# Altium PCB R45_PCBM.PcbDoc (part 1 of 8)
Units mm, origin at the board's own origin, x right, y up, seen from the top; angles counter-clockwise.
Board outline 109 x 109 mm, 4 copper layers (Top Layer, Layer 1, Layer 2, Bottom Layer), stack 0.98 mm thick; 9 components, 0 nets, 14 pads, 1504 vias.
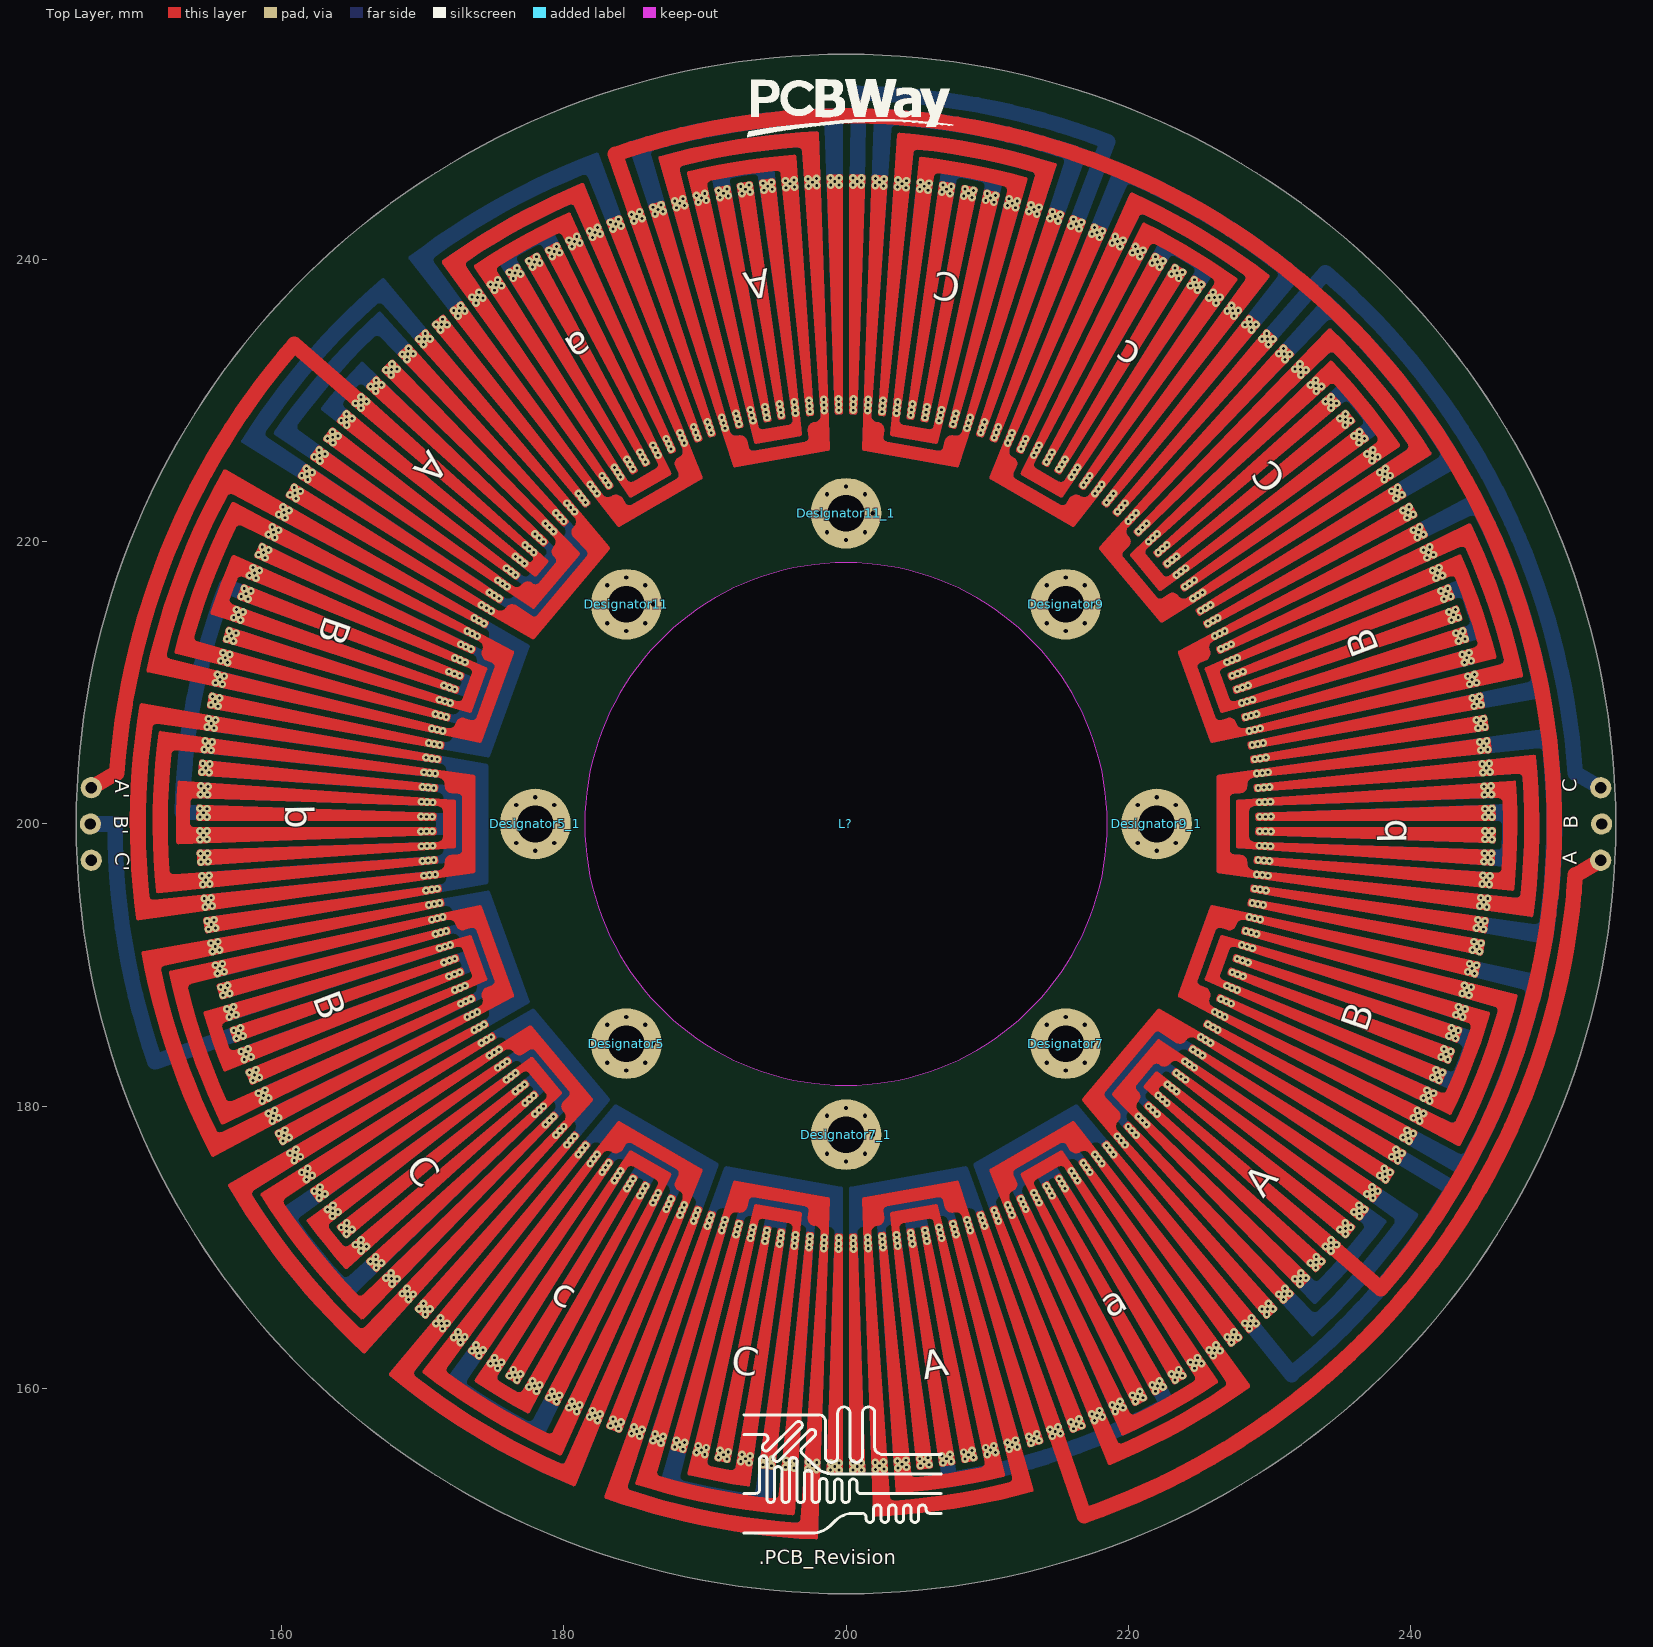
[diagram p0: Top Layer view]
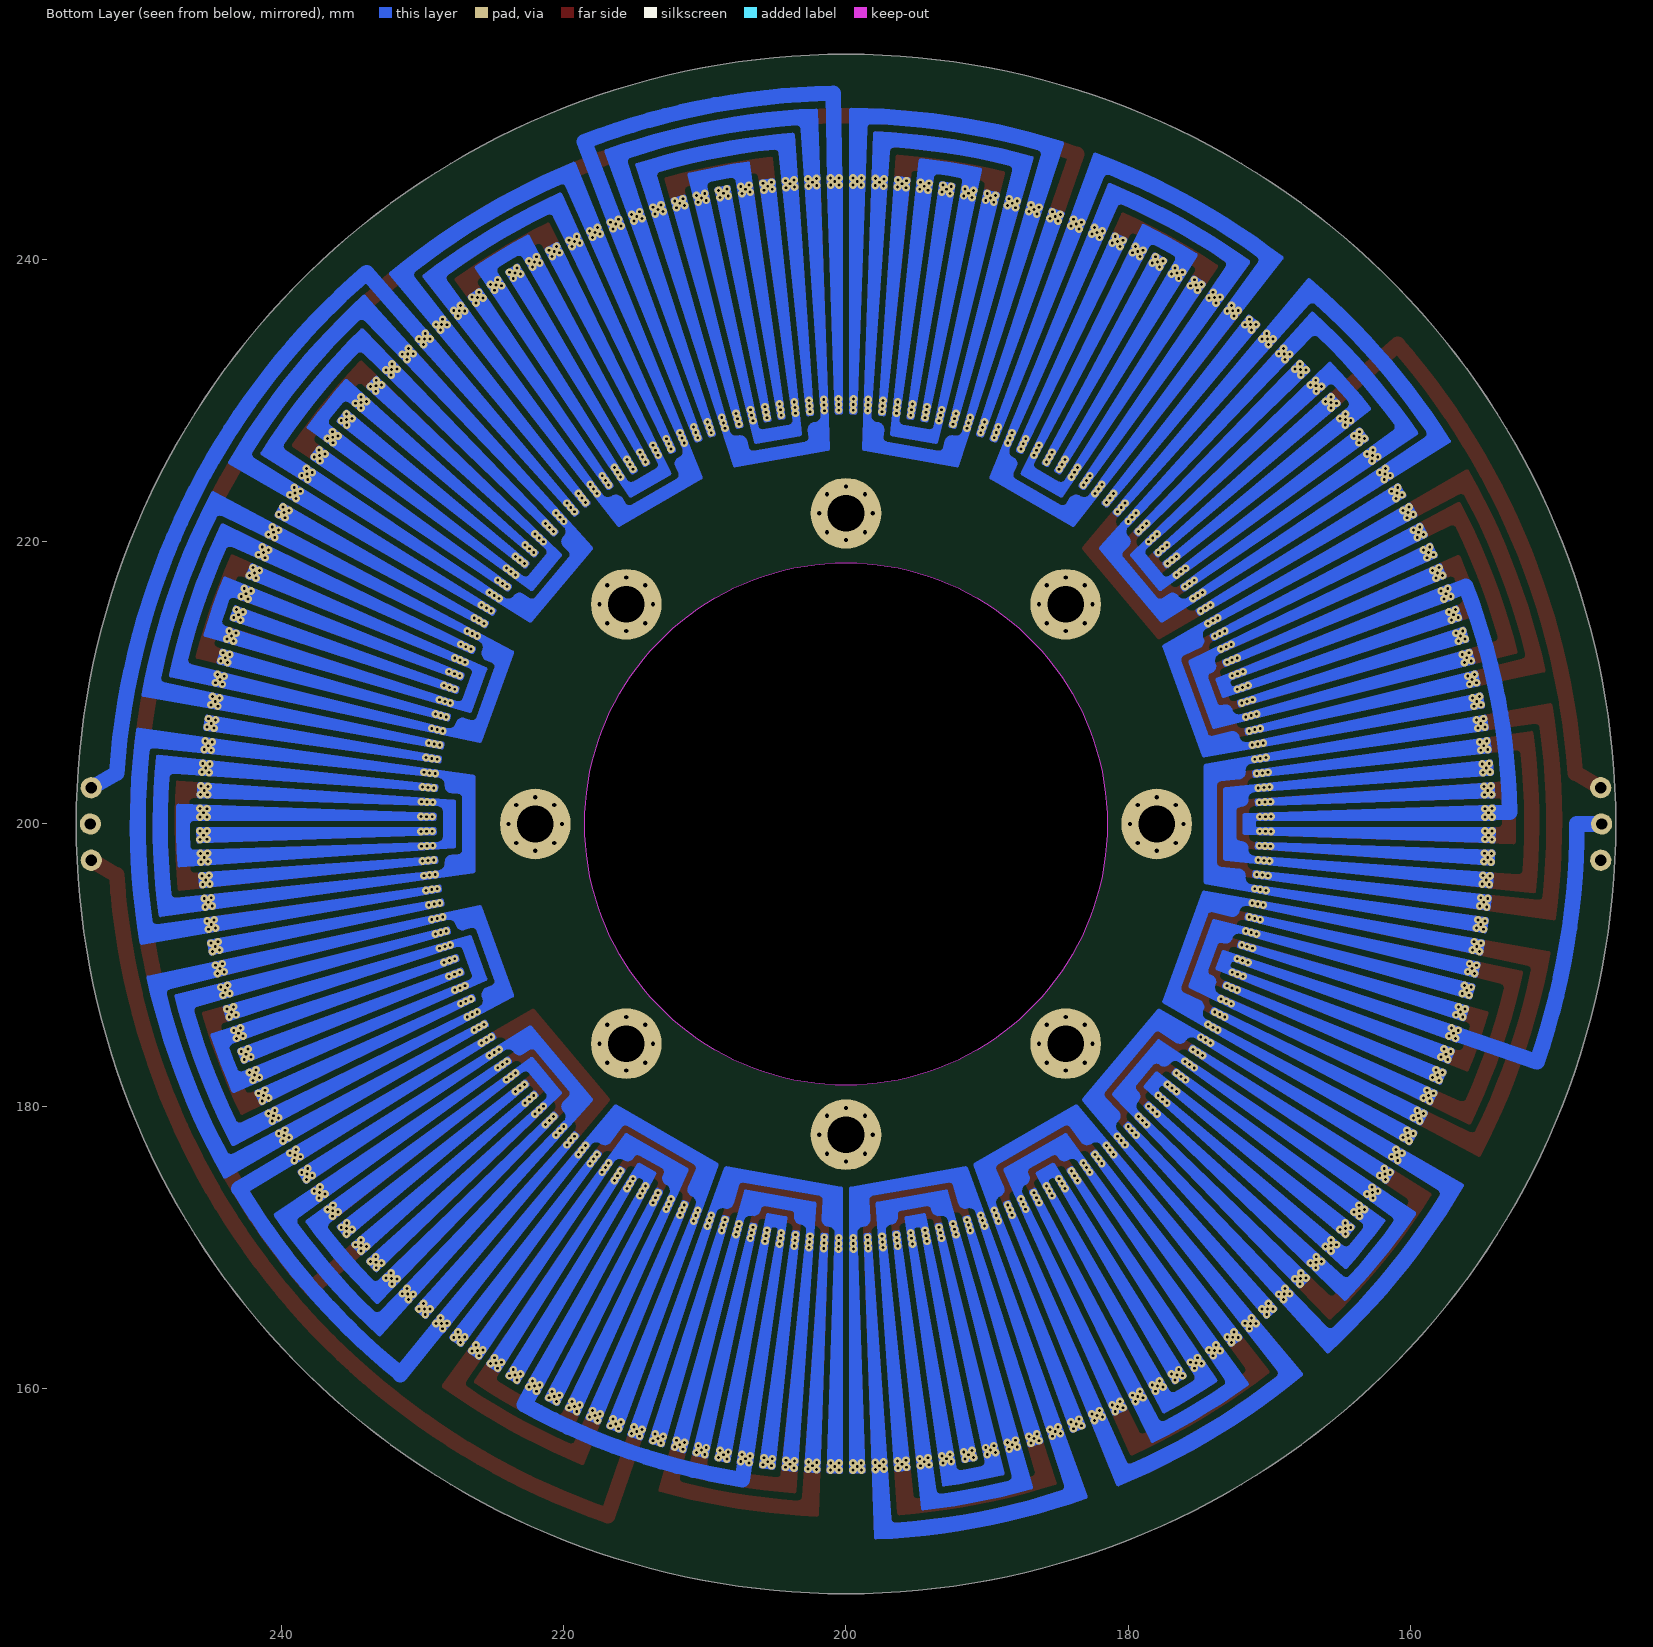
[diagram p1: Bottom Layer view, seen from below]
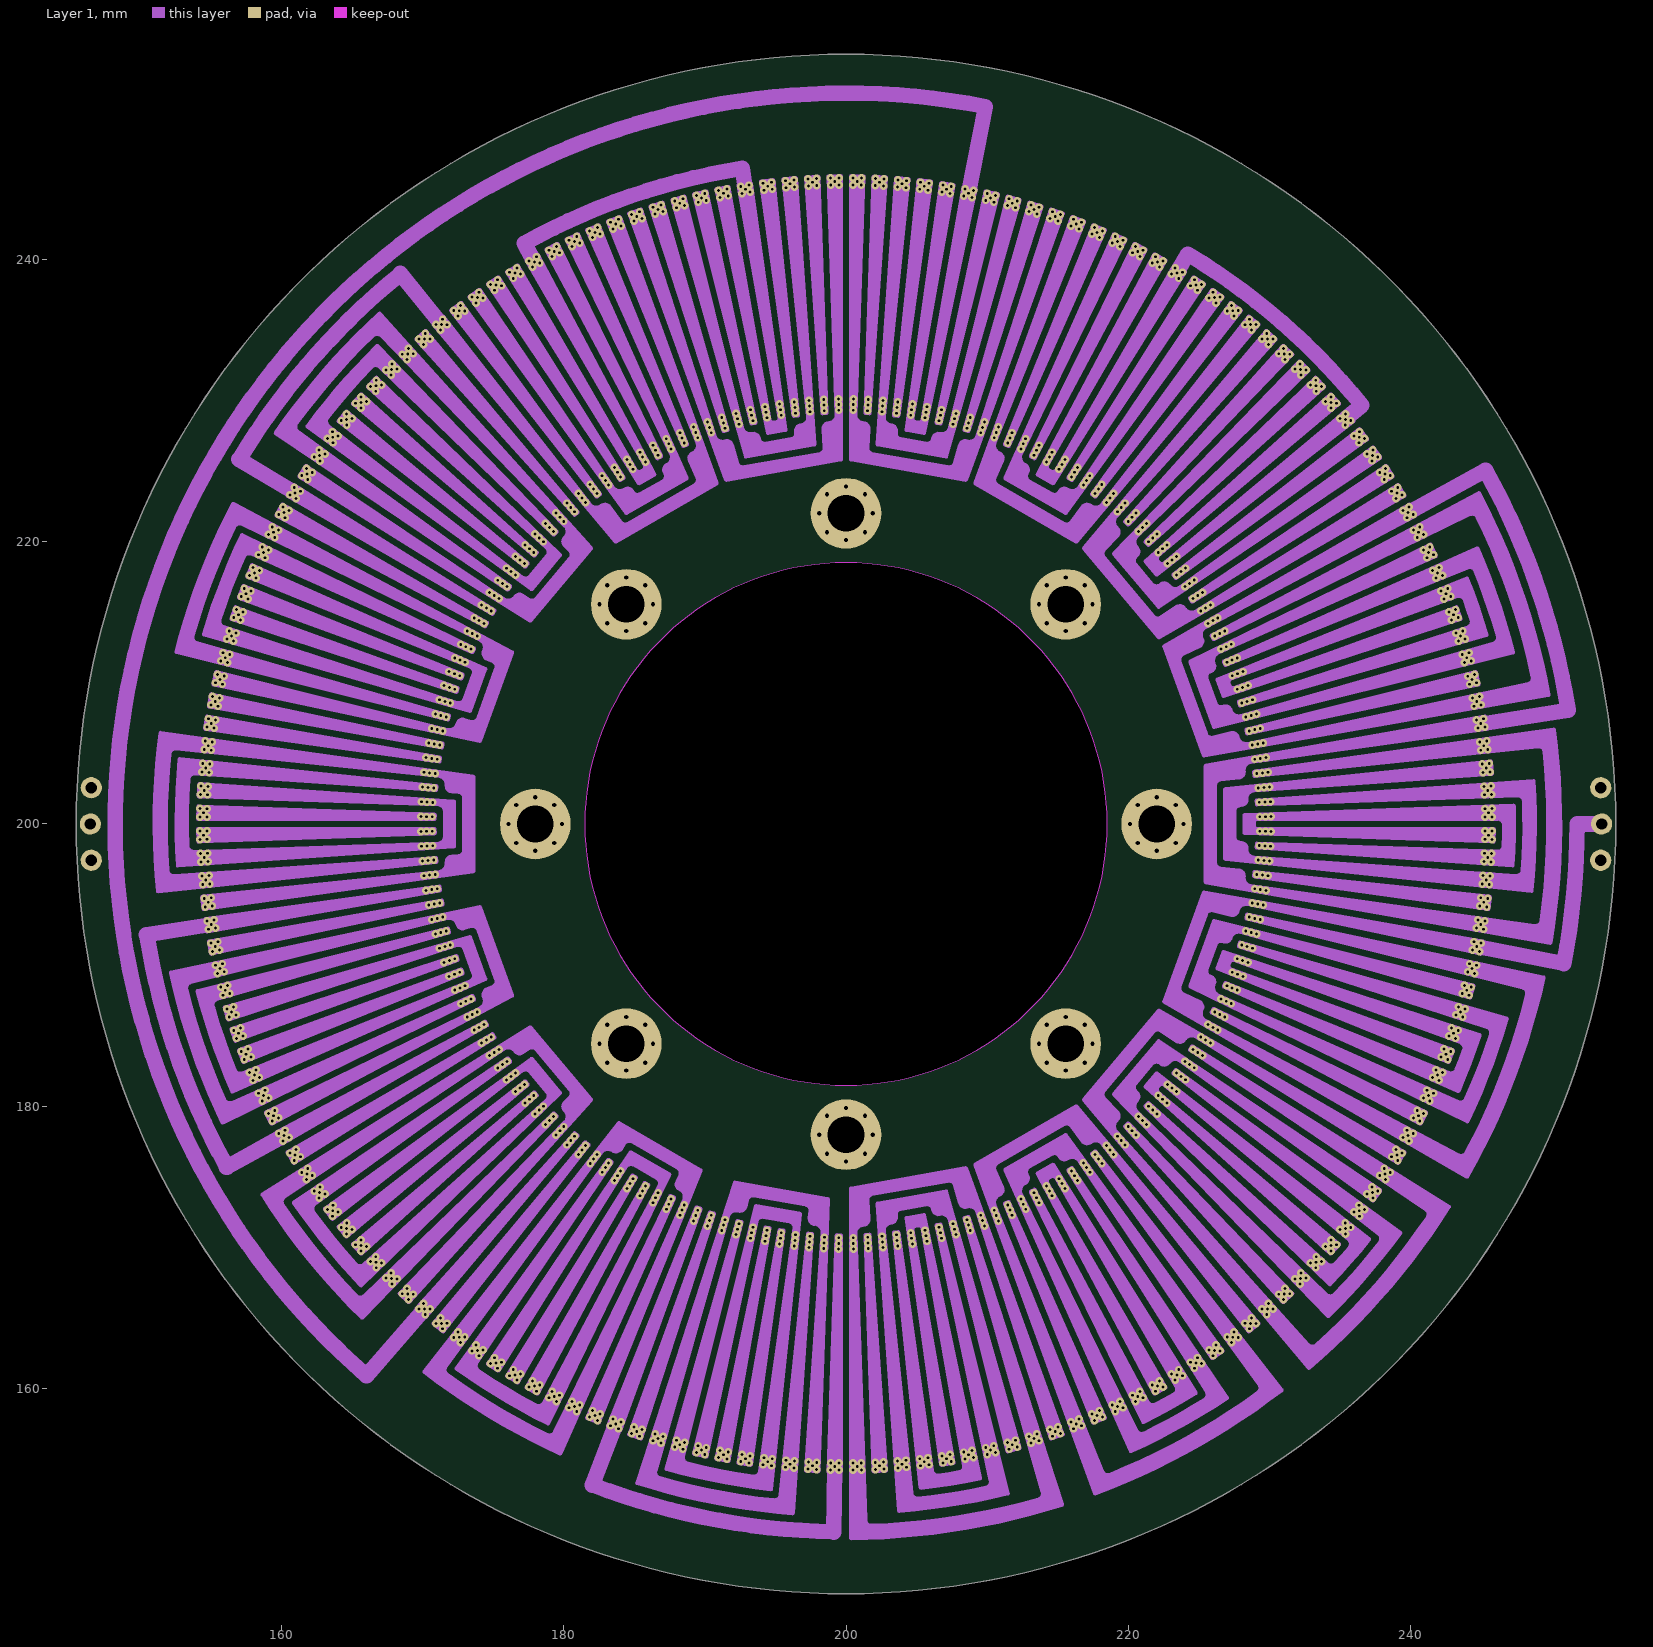
[diagram p2: Layer 1]
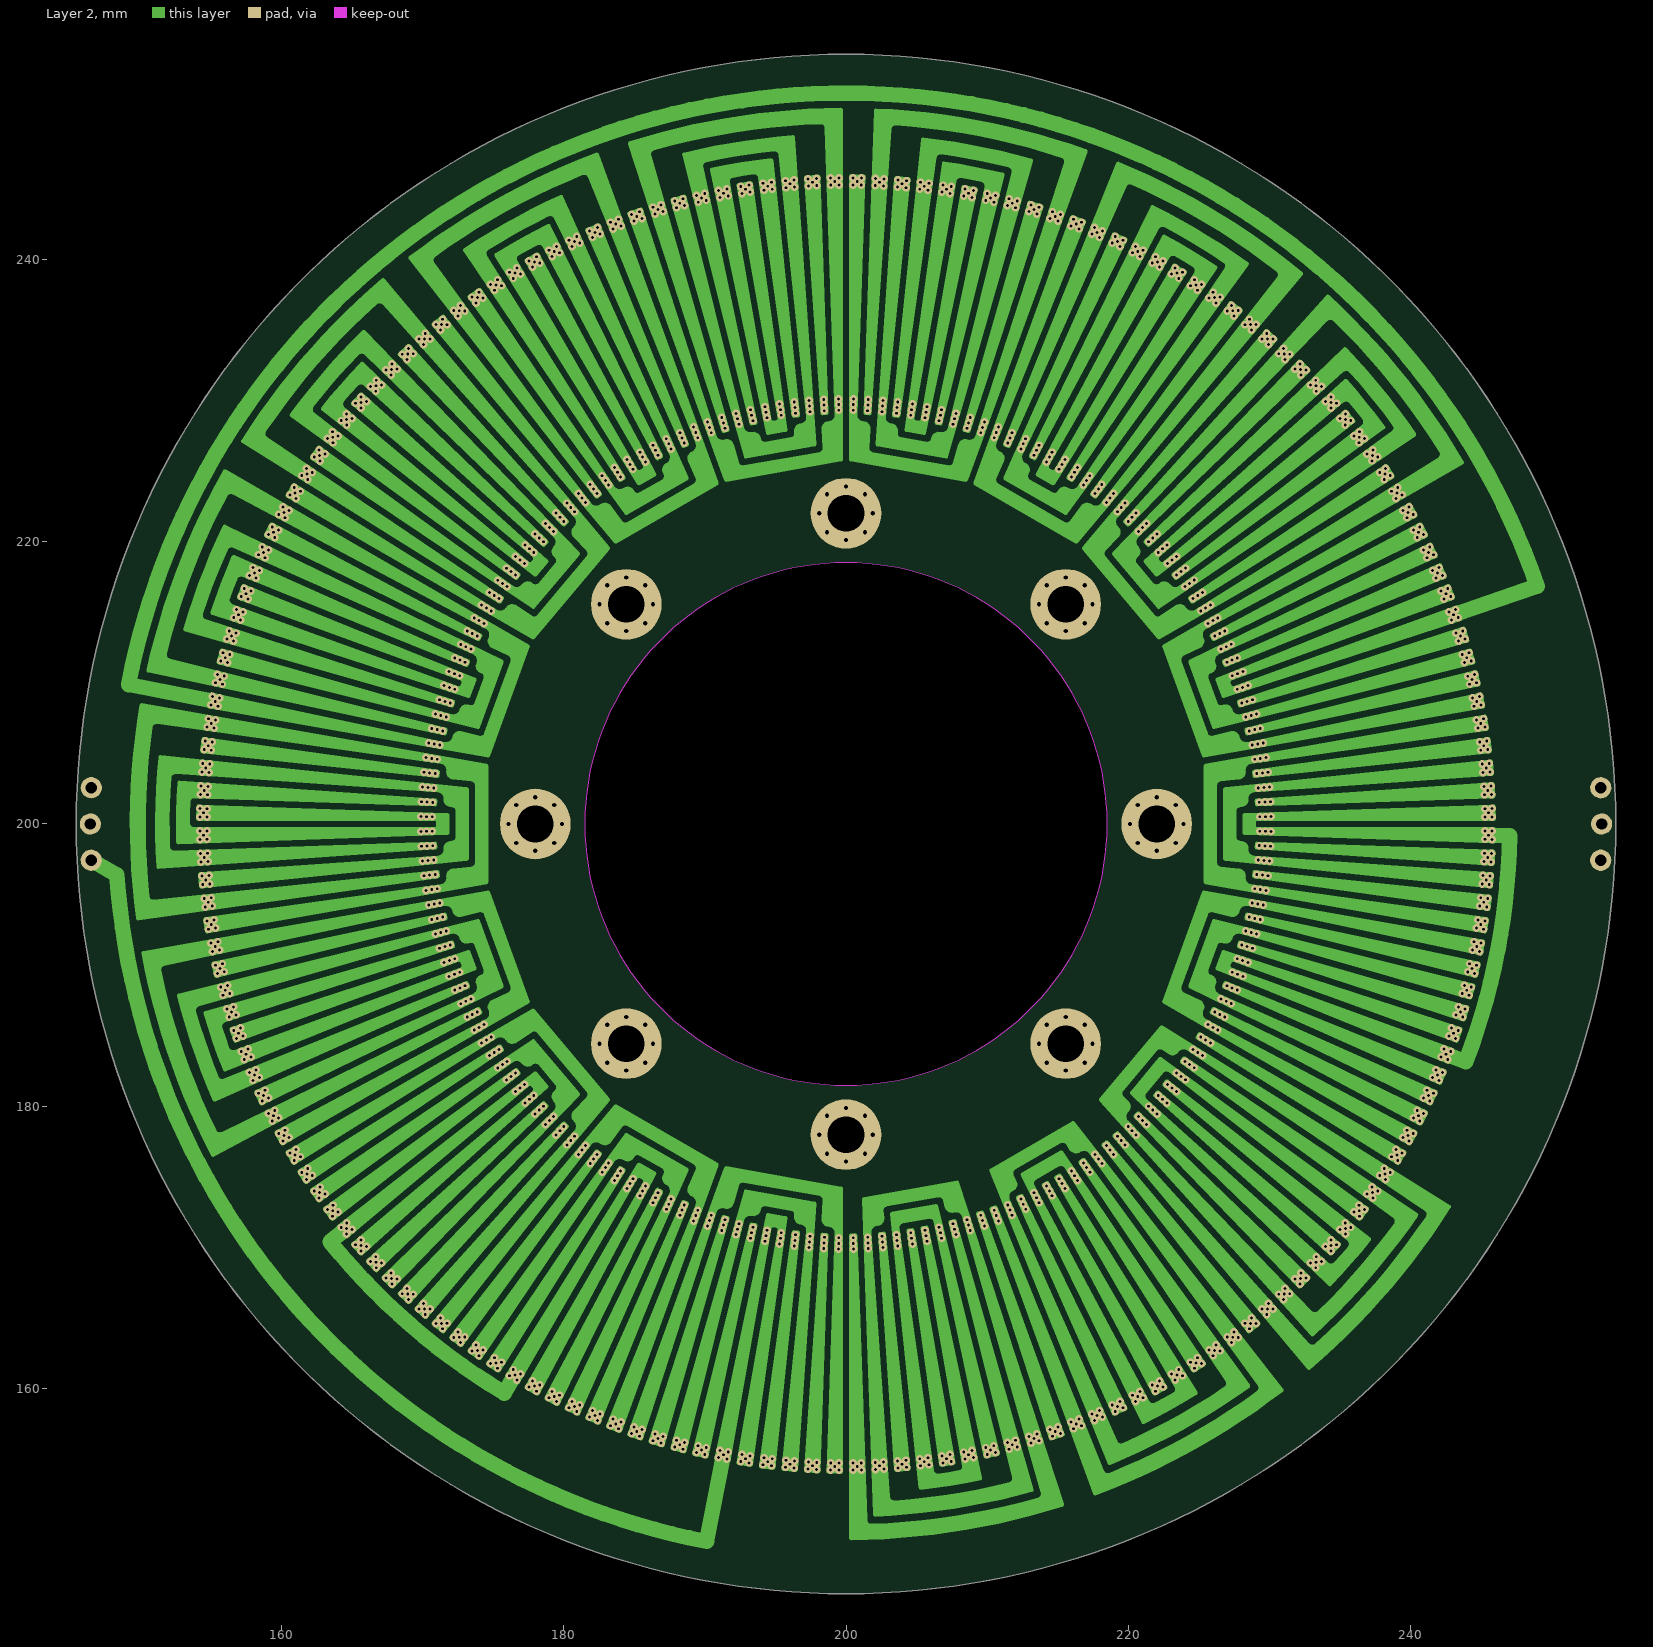
[diagram p3: Layer 2]

## Layer stack, top to bottom
Top Solder: solder mask 0.0102, Solder Resist, Dk 3.5
Top Layer: signal copper 0.21
Dielectric 2: prepreg 0.05, PP-006, Dk 4.1
Layer 1: signal copper 0.21
Dielectric 1: dielectric 0.04, FR-4, Dk 4.8
Layer 2: signal copper 0.21
Dielectric 3: prepreg 0.05, PP-006, Dk 4.1
Bottom Layer: signal copper 0.21
Bottom Solder: solder mask 0.0102, Solder Resist, Dk 3.5

## Board outline
200,145.5 cw(c200,200) 145.5,200 cw(c200,200) 200,254.5 cw(c200,200) 254.5,200 cw(c200,200)
cut-out: 181.5,200 ccw(c200,200) 200,181.5 ccw(c200,200) 218.5,200 ccw(c200,200) 200,218.5 ccw(c200,200)

## Design rules (kind name [scope] priority, off if disabled: settings)
BoardOutlineClearance [All] p1: gap=0.2 ignorepadtopadclearanceinfootprint=FALSE
Clearance [not (InComponent('L1') or InNet('A') or InNet('B')    or InNet('C'))] p1: gap=0.1 ignorepadtopadclearanceinfootprint=FALSE
ComponentClearance [not HasFootprint('M2.5*') vs not HasFootprint('M2.5*')] p1: gap=0 collisioncheckmode=3 verticalgap=2540 showdistances=FALSE
DiffPairsRouting [All] p1: maxlimit=0.5 minlimit=0.2 mostfreqgap=0.254 toplayer_minwidth=0.2 toplayer_maxwidth=0.381 toplayer_prefwidth=0.381 midlayer1_minwidth=0.2 midlayer1_maxwidth=0.381 midlayer1_prefwidth=0.381 midlayer2_minwidth=0.2 midlayer2_maxwidth=0.381 midlayer2_prefwidth=0.381 bottomlayer_minwidth=0.2 bottomlayer_maxwidth=0.381 bottomlayer_prefwidth=0.381 maxuncoupledlength=12.7
HoleSize [All] p1: absolutevalues=TRUE maxlimit=11 minlimit=0.2 maxpercent=80.000 minpercent=20.000
HoleToHoleClearance [All] p1: gap=0.175 allowstackedmicrovias=TRUE
MinimumSolderMaskSliver [All] p1: minsoldermaskwidth=0.1
NetAntennae [not (InComponent('L1') or InNet('A') or InNet('B')    or InNet('C'))] p1: netantennaetolerance=0
PolygonConnect PolygonConnect_TR [HasFootprint('C0402') or HasFootprint('C0603') or HasFootprint('R*') or IsThruPin] p1: connectstyle=Relief reliefconductorwidth=0.3 reliefentries=4 polygonreliefangle="90 Angle" airgapwidth=0.3
PolygonConnect [All] p2: connectstyle=Direct reliefconductorwidth=0.254 reliefentries=4 polygonreliefangle="90 Angle" airgapwidth=0.254
RoutingVias [All] p1: holewidth=0.3 width=0.7 viastyle="Through Hole" minholewidth=0.2 minwidth=0.55 maxholewidth=0.3 maxwidth=0.7
ShortCircuit [not (InComponent('L1') or InNet('A') or InNet('B')    or InNet('C')) vs not (InComponent('L1') or InNet('A') or InNet('B')    or InNet('C'))] p1: allowed=FALSE
SilkToSilkClearance [All] p1: silktosilkclearance=0
SilkToSolderMaskClearance [IsPad] p1: minsilkscreentomaskgap=0.15 clearancetoexposedcopper=TRUE
SolderMaskExpansion SolderMaskExpansion_via [IsVia] p1: expansion=-0.175 istentingtop=FALSE
SolderMaskExpansion [All] p2: expansion=0.05 istentingtop=FALSE
UnRoutedNet [not (InComponent('L1') or InNet('A') or InNet('B')    or InNet('C')) AND InAnyNet] p1: checkbadconnections=TRUE
Width [All] p1: maxlimit=10 minlimit=0.2 preferedwidth=0.2
20 further rules are at their usual default settings.

## Classes and differential pairs
component class R45_PCBM: L?

## Components (designator, comment, footprint, x,y, rotation, side; value= is the part's Value field where it differs from the comment)
Designator5 "Comment" M2.5_HOLE 184.444,184.444 r45 top
Designator5_1 "Comment" M2.5_HOLE 178,200 r0 top
Designator7 "Comment" M2.5_HOLE 215.556,184.444 r135 top
Designator7_1 "Comment" M2.5_HOLE 200,178 r90 top
Designator9 "Comment" M2.5_HOLE 215.556,215.557 r225 top
Designator9_1 "Comment" M2.5_HOLE 222,200 r180 top
Designator11 "Comment" M2.5_HOLE 184.444,215.556 r315 top
Designator11_1 "Comment" M2.5_HOLE 200,222 r270 top
L? "L_phase" R45_stator 200,200 r1 top locked

## Footprints (in the part's own frame and the unit in brackets; to place one, negate y for a bottom-side part, rotate by r counter-clockwise, add the part's x,y. Pads: shape width x height; smd on the part's side, far side on the other; paste and mask are expansions set on the pad)
M2.5_HOLE [mm]
  round 5 hole 2.6: 1(0,0)